# Altium PCB Master_PCB.PcbDoc
Units mm, origin at the board's own origin, x right, y up, seen from the top; angles counter-clockwise.
Board outline 90.25 x 90.25 mm, 4 copper layers (Top Layer, 3V3, M_GND, 5V), stack 0.603 mm thick; 75 components, 63 nets, 292 pads, 84 vias.
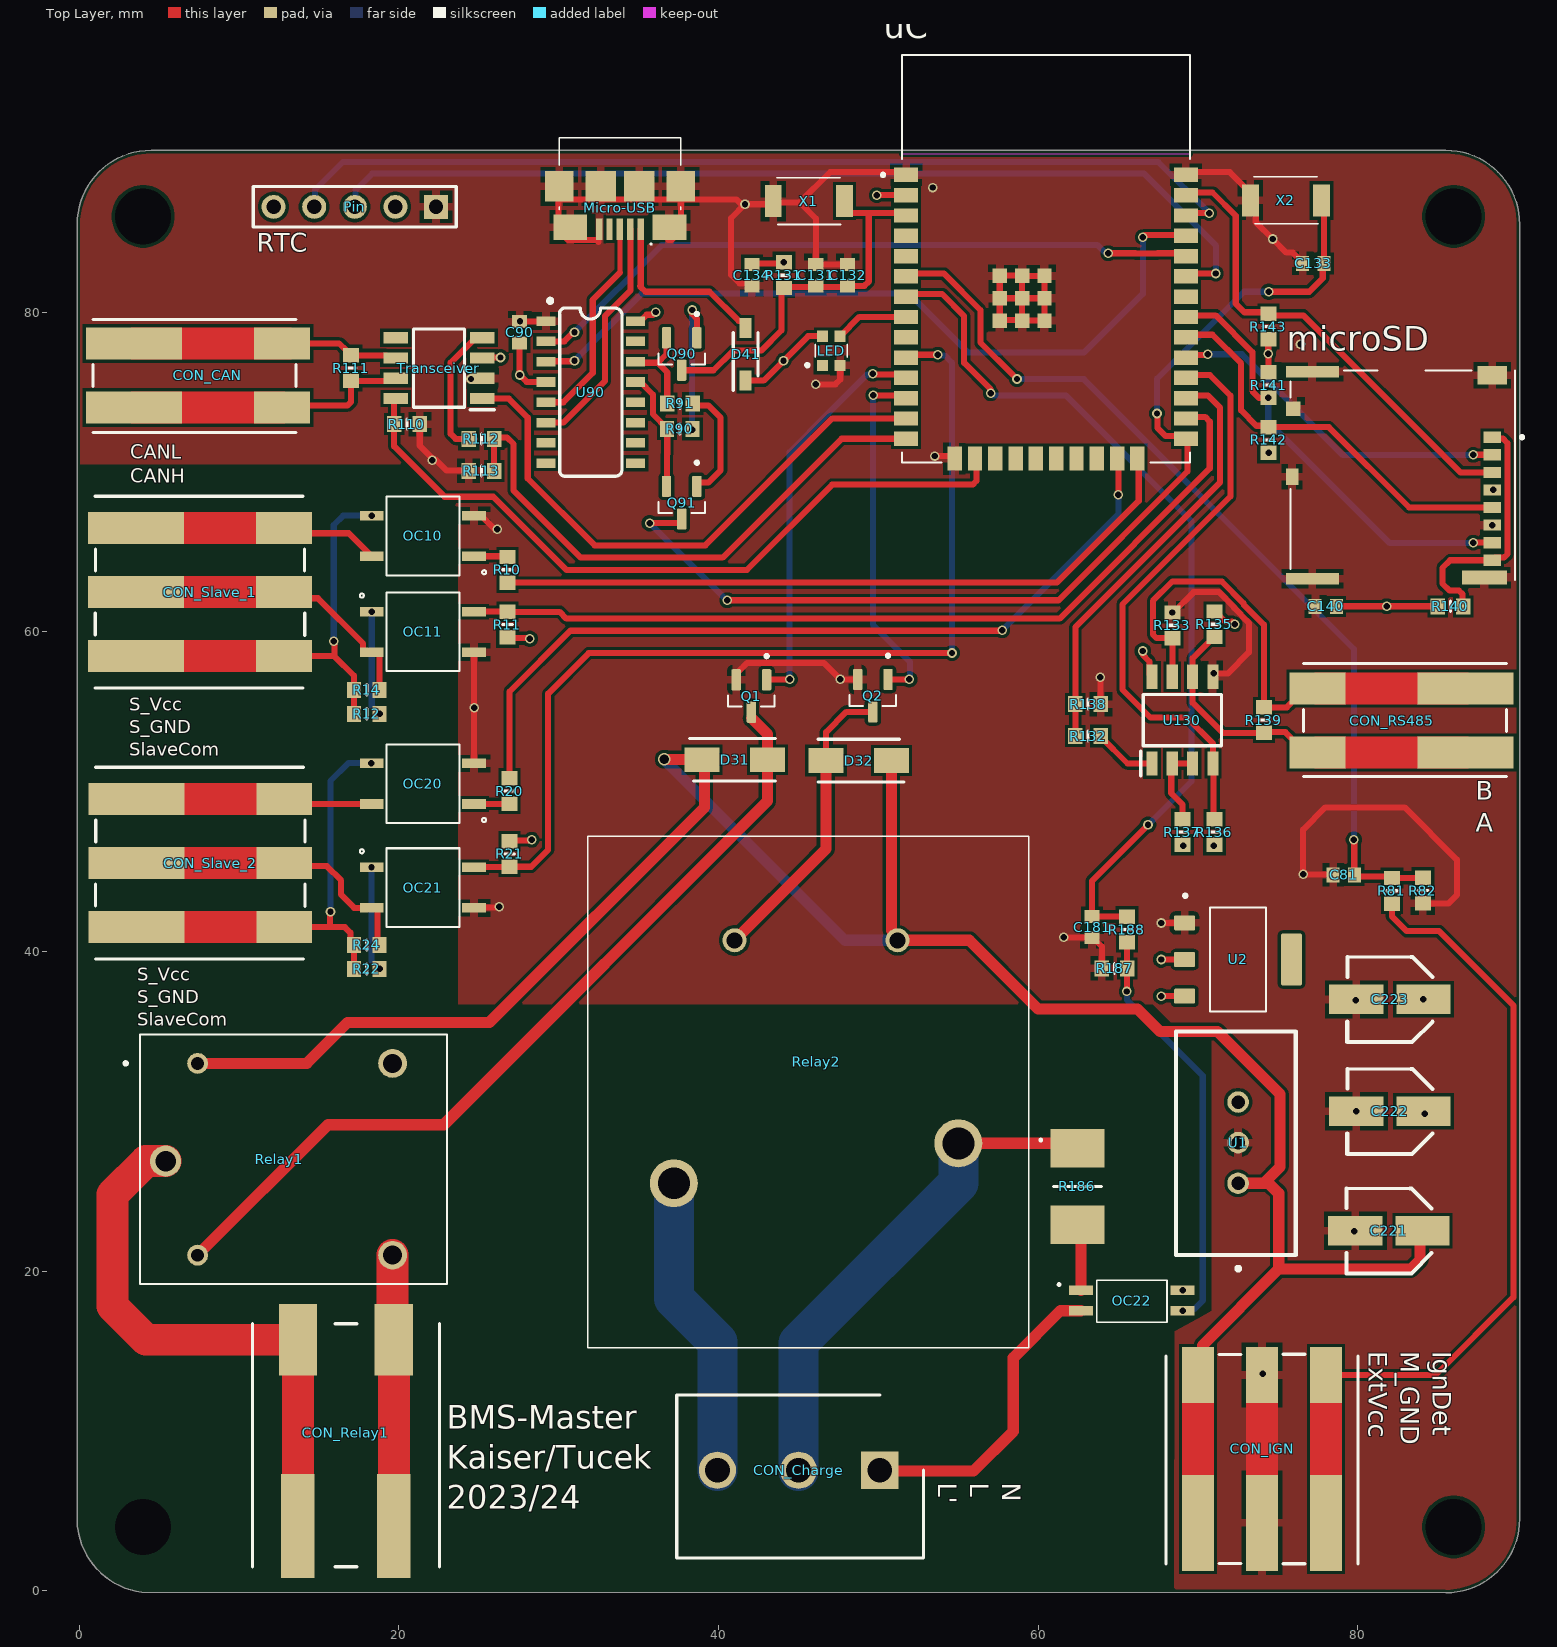
[diagram p0: Top Layer view]
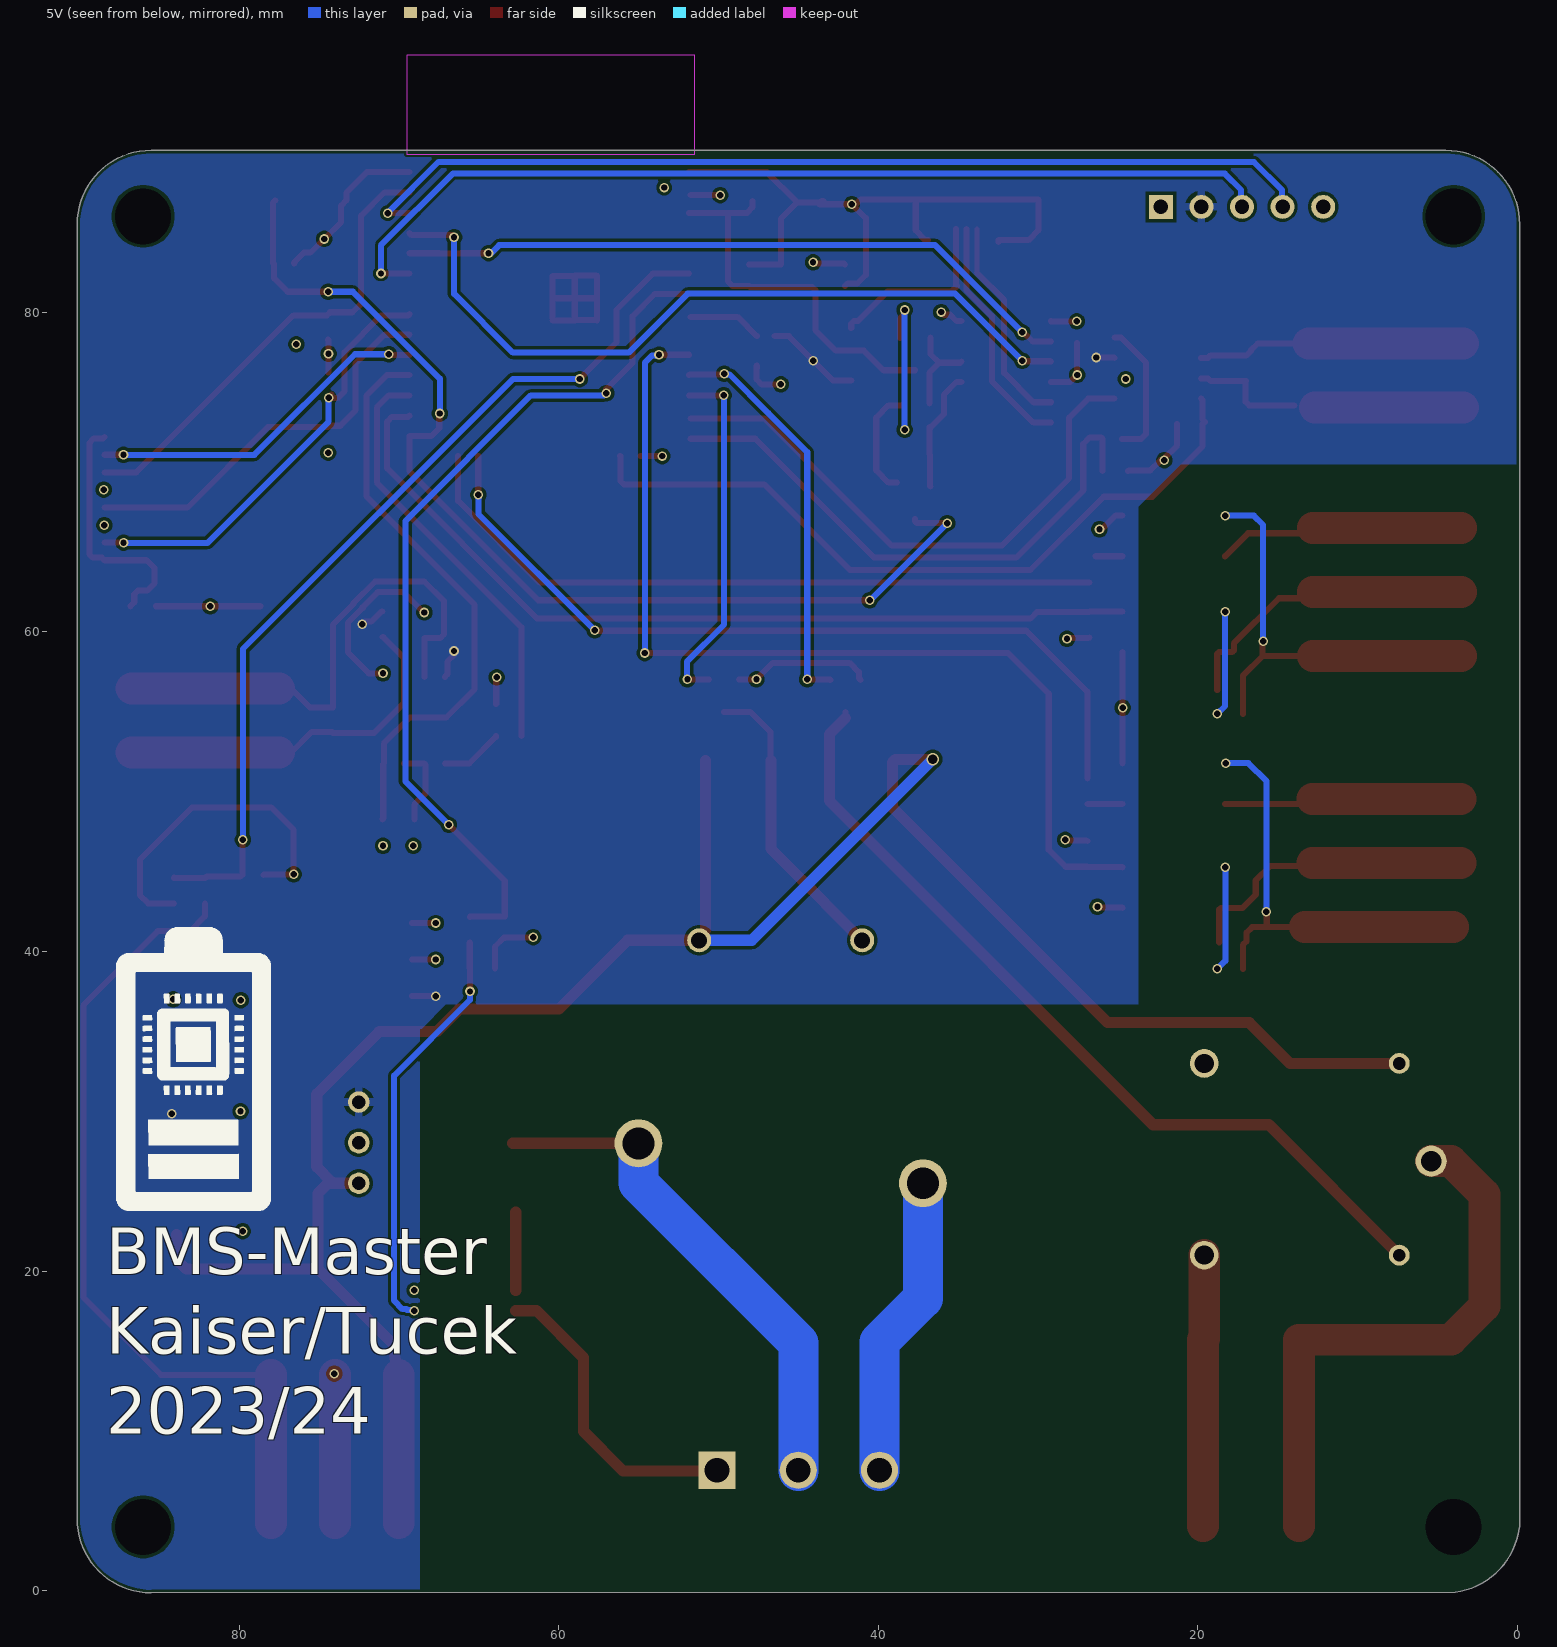
[diagram p1: 5V view, seen from below]
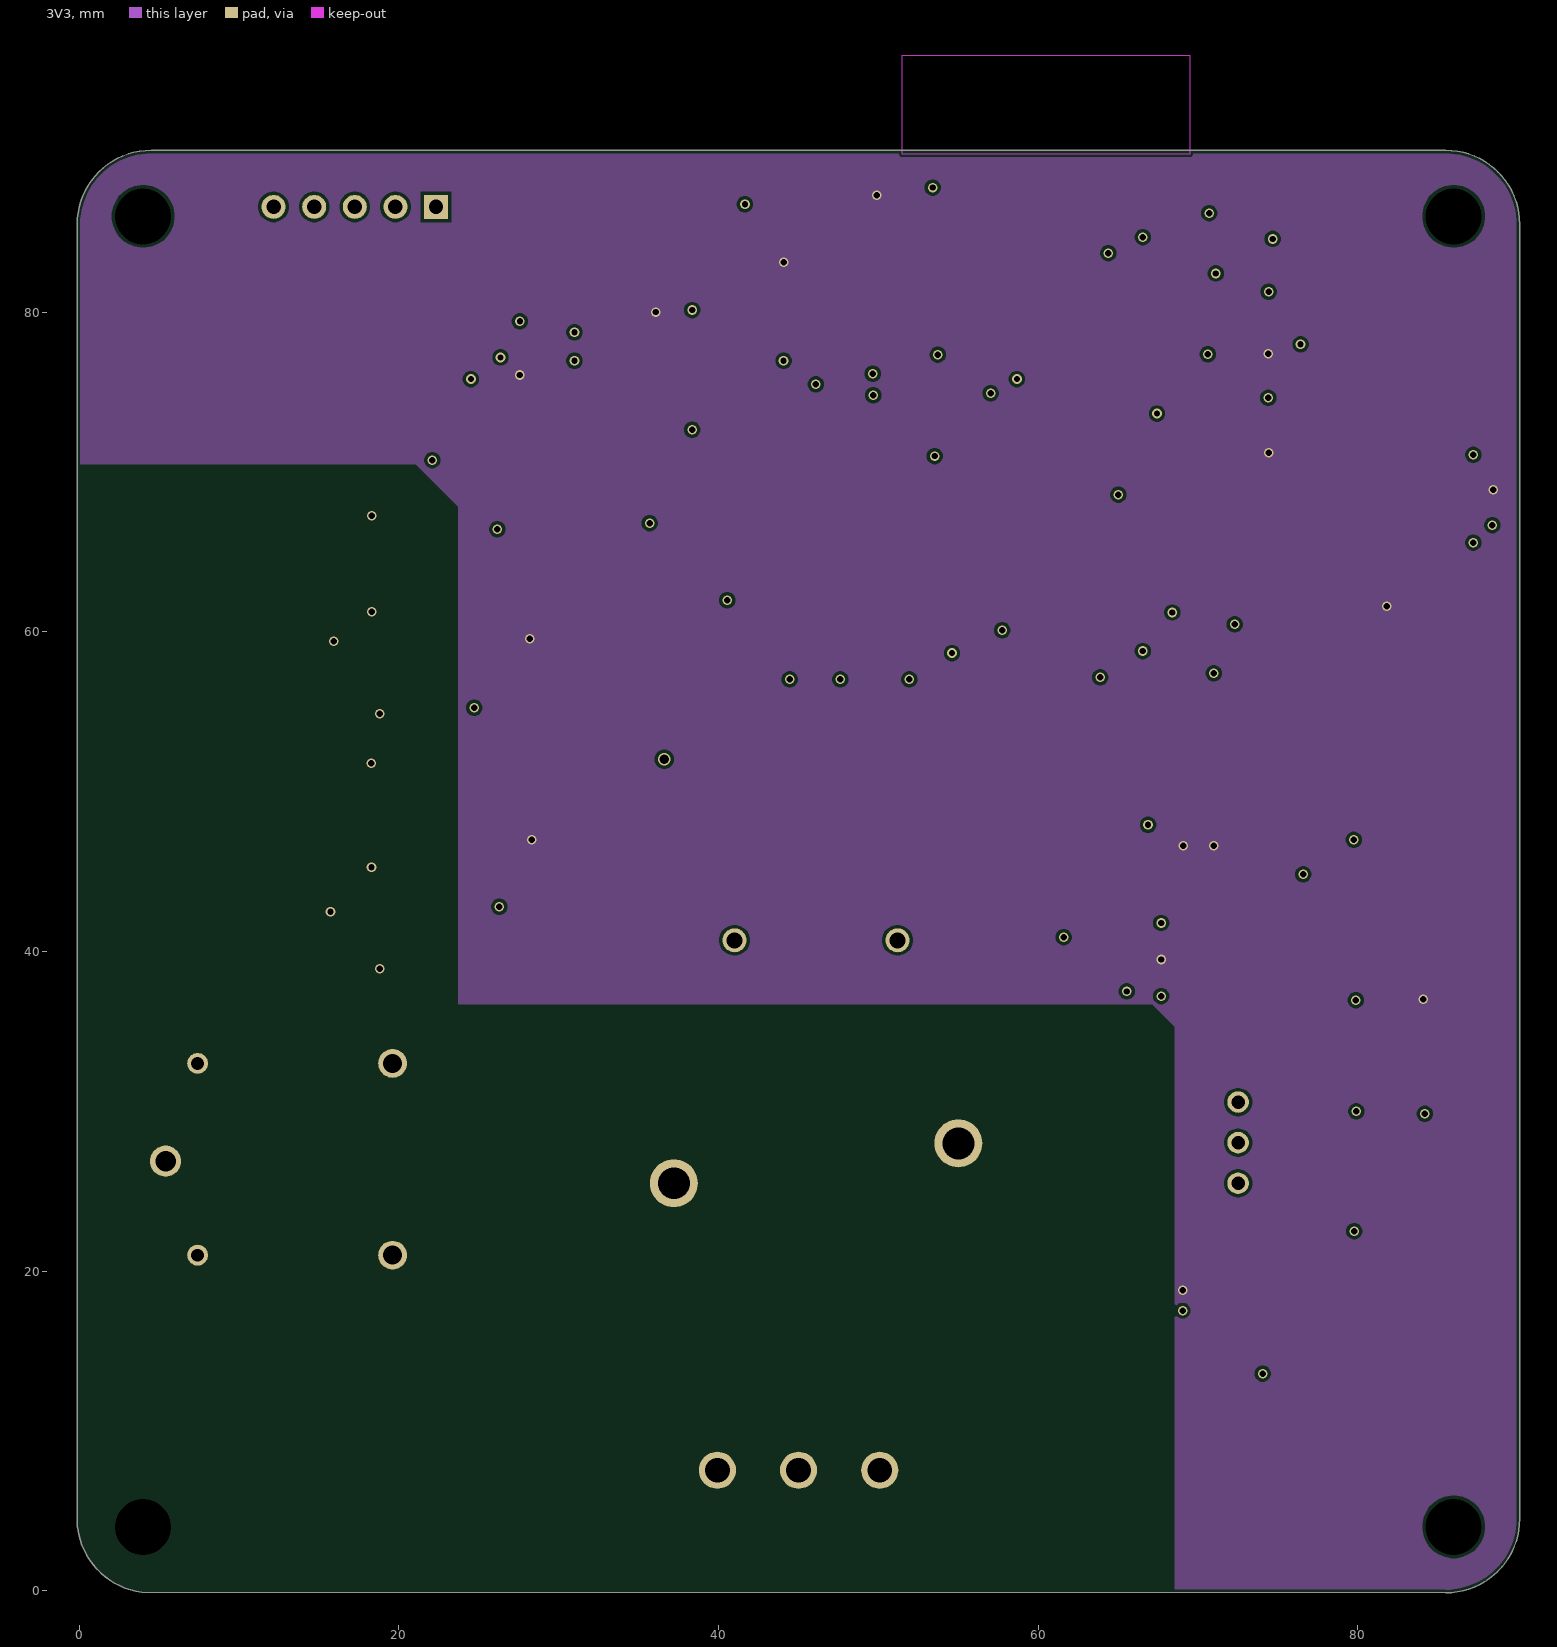
[diagram p2: 3V3]
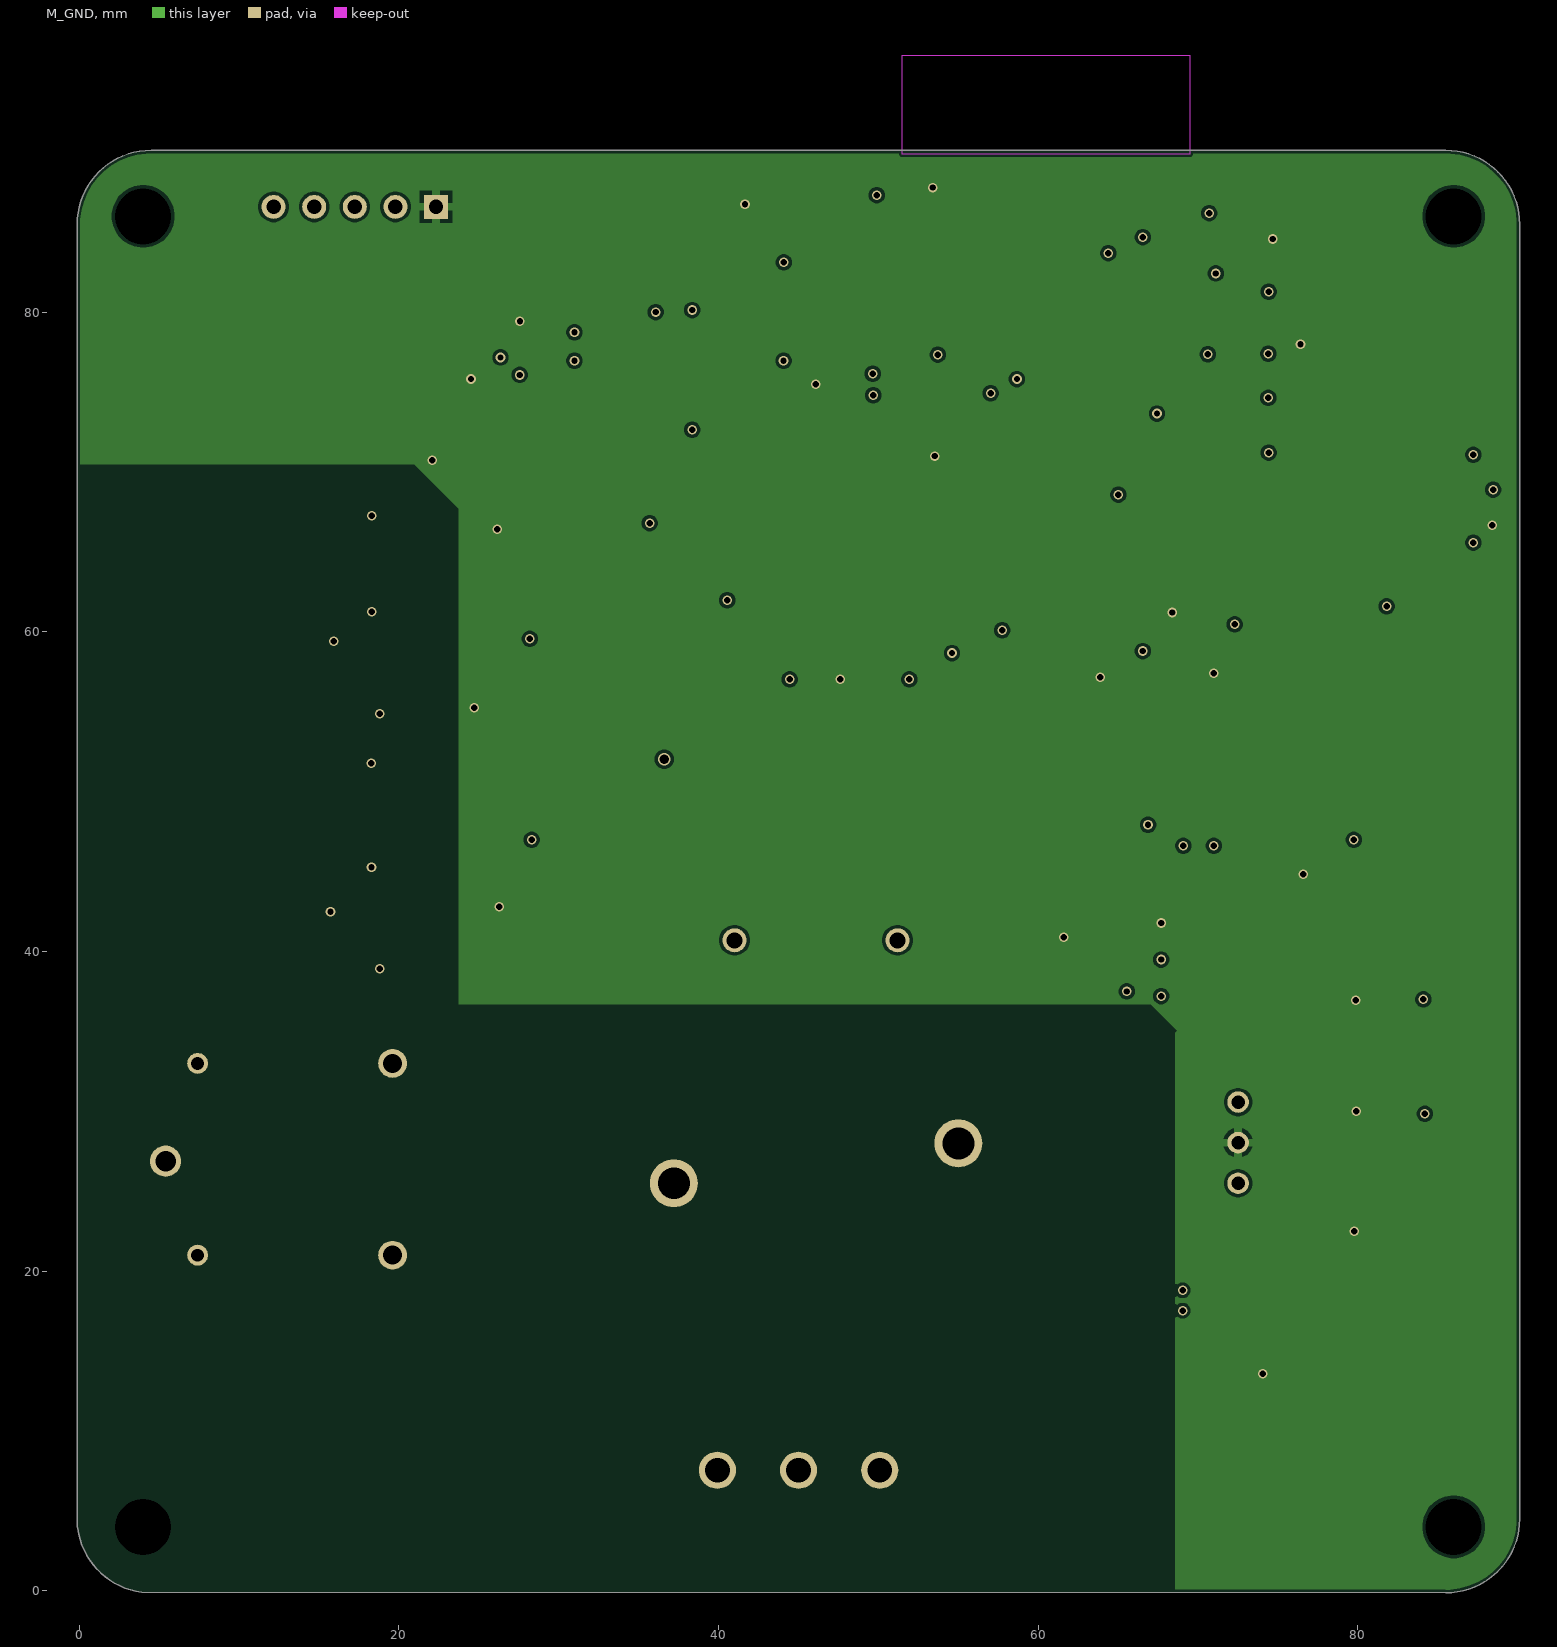
[diagram p3: M_GND]
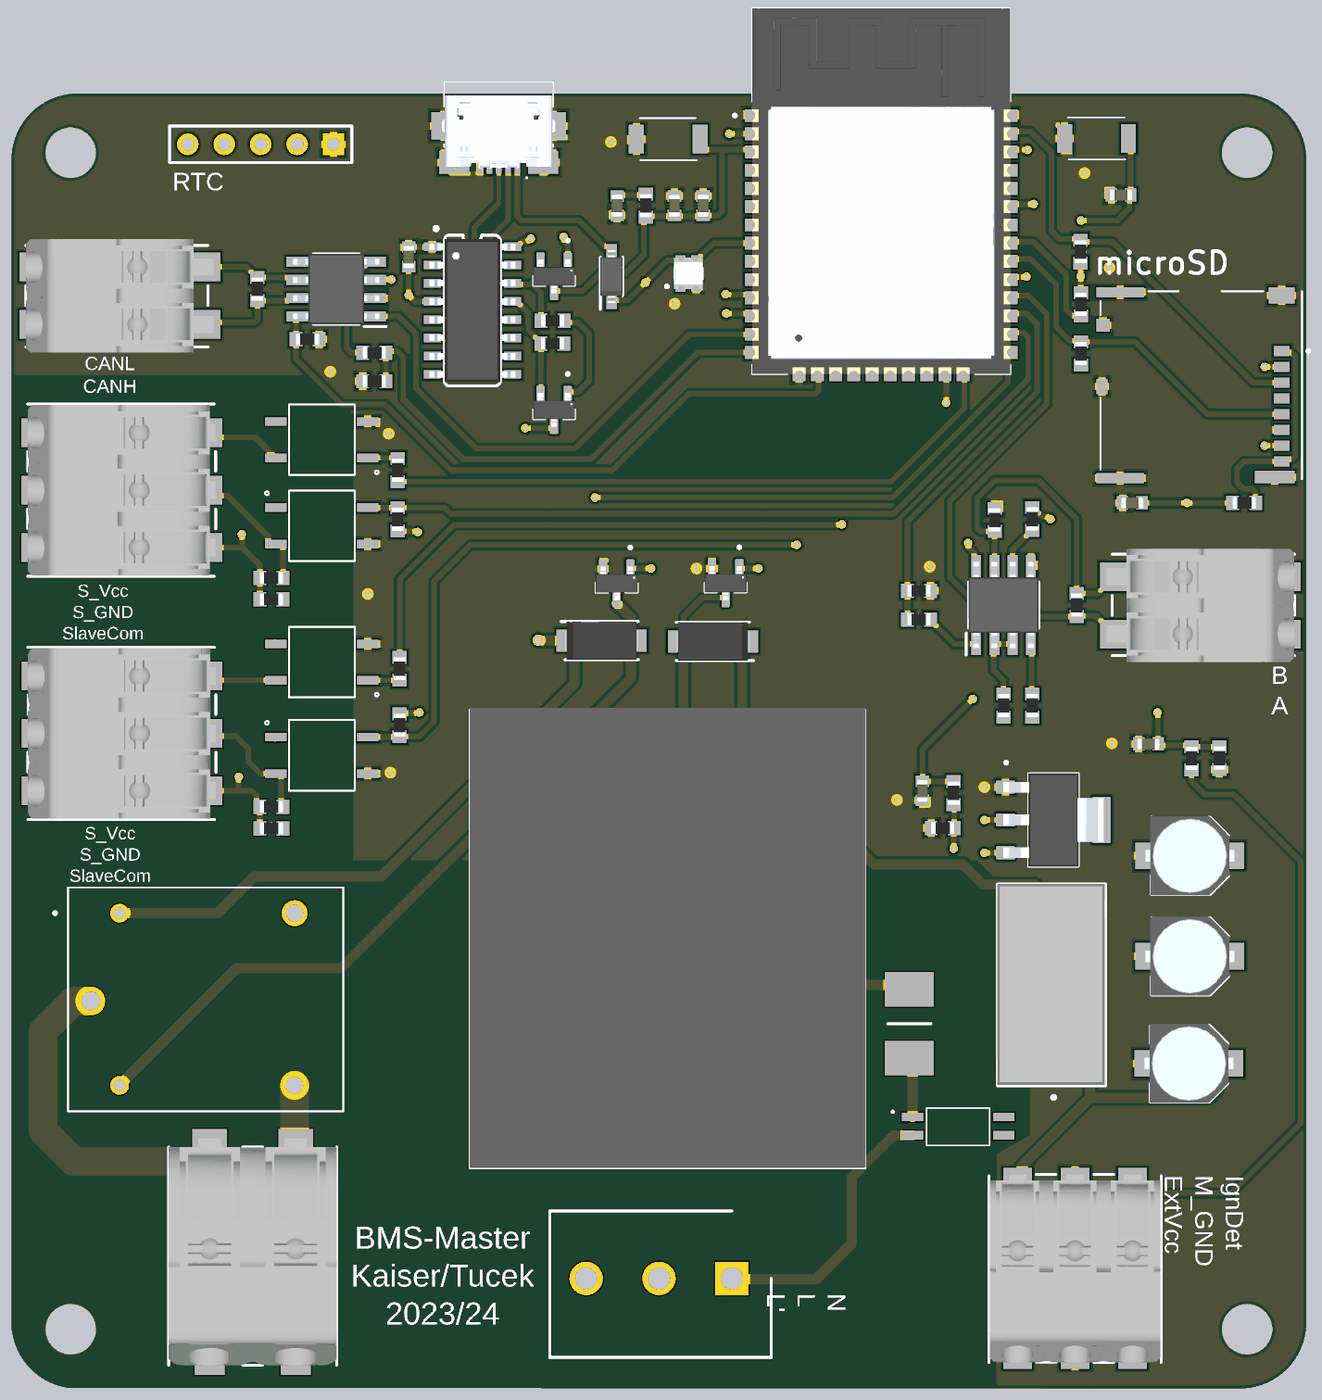
[diagram p4: 3D render of the assembled board from above, using the file's embedded part models]

## Layer stack, top to bottom
Top Solder: solder mask 0.0102, Solder Resist, Dk 3.5
Top Layer: signal copper 0.0356
Dielectric 2: prepreg 0.0711, PP-006, Dk 4.1
3V3: signal copper 0.035
Dielectric 1: dielectric 0.32, FR-4, Dk 4.8
M_GND: signal copper 0.035
Dielectric 3: prepreg 0.0711, PP-006, Dk 4.1
5V: signal copper 0.0356
Bottom Solder: solder mask 0.0102, Solder Resist, Dk 3.5

## Board outline
3.909,-0.09 cw(c4.5,4.5) -0.09,3.909 -0.127,4 -0.127,85.5 -0.127,85.501 cw(c4.5,85.5) 4.498,90.127 4.5,90.127 85.5,90.127 85.502,90.127 cw(c85.5,85.5) 90.127,85.502 90.127,85.5 90.127,4.5 90.127,4.498 cw(c85.5,4.5) 85.502,-0.127 85.5,-0.127

## Design rules (kind name [scope] priority, off if disabled: settings)
BoardOutlineClearance [All] p1: gap=0.2 ignorepadtopadclearanceinfootprint=FALSE except(0.4: Arc-SplitBarrior Arc-SplitContinuation Track-SplitBarrior Track-SplitContinuation SMDPad-SplitBarrior SMDPad-SplitContinuation THPad-SplitBarrior THPad-SplitContinuation Via-SplitBarrior Via-SplitContinuation Fill-SplitBarrior Fill-SplitContinuation Poly-SplitBarrior Poly-SplitContinuation Region-SplitBarrior Region-SplitContinuation Text-SplitBarrior Text-SplitContinuation)
Clearance "Clearance Bottom Layer" [OnLayer('Bottom Layer')] p1: gap=0.203 ignorepadtopadclearanceinfootprint=TRUE except(0.254: Arc-Text Track-Text SMDPad-Text THPad-Text Via-Text Fill-Text Poly-Text Region-Text Text-Text)
Clearance "Clearance Top Layer" [OnLayer('Top Layer')] p2: gap=0.203 ignorepadtopadclearanceinfootprint=TRUE except(0.254: Arc-Text Track-Text SMDPad-Text THPad-Text Via-Text Fill-Text Poly-Text Region-Text Text-Text)
Clearance [All] p3: gap=0.2 ignorepadtopadclearanceinfootprint=FALSE except(0.089: Arc-Arc Arc-Track Arc-SMDPad Track-Track Track-SMDPad SMDPad-SMDPad; 0.127: Arc-Via Track-Via SMDPad-Via THPad-Via Via-Via; 0.254: Arc-Text Track-Text SMDPad-Text THPad-Text Via-Text Fill-Text Poly-Text Region-Text Text-Text)
HoleSize [All] p1: absolutevalues=TRUE maxlimit=6.3 minlimit=0.2 maxpercent=80.000 minpercent=20.000
MinimumAnnularRing [All] p1: minimumring=0.076
MinimumSolderMaskSliver [All] p1: minsoldermaskwidth=0.1
PolygonConnect PolygonConnect_1 [All] p1: thpad.connectstyle=Relief thpad.reliefconductorwidth=0.508 thpad.reliefentries=4 thpad.polygonreliefangle="90 Angle" thpad.airgapwidth=0.254 smdpad.connectstyle=Relief smdpad.reliefconductorwidth=0.508 smdpad.reliefentries=4 smdpad.polygonreliefangle="90 Angle" smdpad.airgapwidth=0.254 via.connectstyle=Direct via.reliefconductorwidth=0.508 via.reliefentries=4 via.polygonreliefangle="90 Angle" via.airgapwidth=0.254
RoutingCorners [All] p1: cornerstyle=Round minsetback=2.54 maxsetback=2.54
RoutingVias [All] p1: holewidth=0.5 width=1 viastyle="Through Hole" minholewidth=0.15 minwidth=0.25 maxholewidth=1 maxwidth=2
SilkToSilkClearance [All] p1: silktosilkclearance=0.1
SilkToSolderMaskClearance [IsPad] p1: minsilkscreentomaskgap=0.1 clearancetoexposedcopper=TRUE
SolderMaskExpansion [All] p1: expansion=0.102 istentingtop=FALSE
Width [All] p1: maxlimit=2.54 minlimit=0.089 preferedwidth=0.381
25 further rules are at their usual default settings.

## Components (designator, comment, footprint, x,y, rotation, side; value= is the part's Value field where it differs from the comment)
C81 "1u" CAPC1608X90N 79.127,44.797 r0 top
C90 "100n" CAPC1608X90N 27.559,78.74 r90 top
C131 "100n" CAPC1608X90N 46.085,82.315 r270 top
C132 "100n" CAPC1608X90N 48.085,82.315 r270 top
C133 "100n" CAPC1608X90N 77.216,83.058 r0 top
C134 "100n" CAPC1608X90N 42.085,82.315 r90 top
C140 "0.1u" CAPC1608X90N 78,61.6 r0 top
C181 "1u" CAPC1608X90N 63.373,41.529 r270 top
C221 "100u" CAPAE530X550N 81.95,22.525 r180 top
C222 "100u" CAPAE530X550N 82.008,30 r180 top
C223 "100u" CAPAE530X550N 82.008,37 r180 top
CON_CAN "2060-452_998-404" 2060-452998-404 0.871,76.041 r0 top
CON_Charge "WJ500V-5.08-3P" SHDR3W95P0X508_1X3_1524X1000X1420P 50.089,7.544 r180 top
CON_IGN "2060-453_998-404" 2060-453998-404 74.008,1.692 r90 top
CON_Relay1 "2061-602_998-404" 2061-602998-404 16.685,1.506 r90 top
CON_RS485 "2060-452_998-404" 2060-452998-404 89.299,54.451 r180 top
CON_Slave_1 "2060-453_998-404" 2060-453998-404 0.998,62.484 r0 top
CON_Slave_2 "2060-453_998-404" 2060-453998-404 1.019,45.529 r0 top
D31 "ES1D-E3_61T" DIOM5127X229N 41.008,52 r0 top
D32 "ES1D-E3_61T" DIOM5127X229N 48.768,51.943 r180 top
D41 "BAT43W-E3-08" SOD3716X135N 41.696,77.37 r90 top
LED "WS2812C-2020" WS2812C2020 47.058,77.585 r270 top
Micro-USB "10118192-0002LF" 101181920002LF 33.833,88.062 r180 top
microSD "503398-1892" MOLEX_503398-1892 82.8,69.8 r270 top
OC10 "VOM617AT" SOIC254P695X242-4N 21.508,66 r180 top
OC11 "VOM617AT" SOIC254P695X242-4N 21.508,60 r0 top
OC20 "VOM617AT" SOIC254P695X242-4N 21.508,50.5 r180 top
OC21 "VOM617AT" SOIC254P695X242-4N 21.508,44 r0 top
OC22 "EL3H4-G" EL3H4G 65.862,18.161 r0 top
Pin "Header 5" HDR1X5 22.323,86.593 r180 top
Q1 "AO3400A" SOT95P237X112-3N 42.058,55.985 r270 top
Q2 "AO3400A" SOT95P237X112-3N 49.657,56.007 r270 top
Q90 "BC817-25_RF" SOT95P237X112-3N 37.696,77.386 r270 top
Q91 "BC817-25_RF" SOT95P237X112-3N 37.696,68.084 r270 top
R10 "120" RESC1608X55N 26.797,63.881 r270 top
R11 "680" RESC1608X55N 26.797,60.452 r270 top
R12 "220" RESC1608X55N 17.992,54.873 r180 top
R14 "2k7" RESC1608X55N 17.992,56.373 r180 top
R20 "120" RESC1608X55N 26.924,50.038 r90 top
R21 "680" RESC1608X55N 26.924,46.101 r90 top
R22 "220" RESC1608X55N 17.992,38.912 r180 top
R24 "2k7" RESC1608X55N 17.992,40.412 r180 top
R81 "33k" RESC1608X55N 82.127,43.797 r270 top
R82 "10k" RESC1608X55N 84.074,43.815 r90 top
R90 "10k" RESC1608X55N 37.575,72.7 r0 top
R91 "10K" RESC1608X55N 37.592,74.295 r0 top
R110 "N.P." RESC1608X55N 20.508,73 r0 top
R111 "120" RESC1608X55N 17.008,76.5 r90 top
R112 "18k" RESC1608X55N 25.165,72.074 r0 top
R113 "33k" RESC1608X55N 25.165,70.074 r0 top
R131 "10k" RESC1608X55N 44.085,82.315 r270 top
R132 "18k" RESC1608X55N 63.129,53.476 r0 top
R133 "22k" RESC1608X55N 68.4,60.411 r90 top
R135 "22k" RESC1608X55N 71.027,60.476 r270 top
R136 "10k" RESC1608X55N 71.027,47.476 r90 top
R137 "10k" RESC1608X55N 69.027,47.476 r90 top
R138 "33k" RESC1608X55N 63.129,55.476 r180 top
R139 "120" RESC1608X55N 74.129,54.476 r270 top
R140 "10k" RESC1608X55N 85.8,61.6 r0 top
R141 "10k" RESC1608X55N 74.422,75.438 r270 top
R142 "10k" RESC1608X55N 74.422,72.009 r90 top
R143 "10k" RESC1608X55N 74.4,79.1 r90 top
R186 "120k" 2512RES 62.459,25.298 r270 top
R187 "10k" RESC1608X55N 64.786,38.942 r180 top
R188 "33k" RESC1608X55N 65.548,41.374 r90 top
Relay1 "SRD-12VDC-SL-C" RELAY_SRD-12VDC-SL-C 13.508,27 r0 top
Relay2 "SLA-12VDC-SL-A" SLA12VDCSLA 36.72,26.476 r0 top
Transceiver "TJA1050T_CM_118" SOIC127P600X175-8N 22.508,76.5 r180 top
U1 "TSR_2-2450" TSR-2 68.618,21 r90 top
U2 "AMS1117-3.3" SOT229P700X180-4N 72.508,39.5 r270 top
U90 "CH340C" SO016 32.008,75 r270 top
U130 "MAX485ESA+T" SOIC127P600X175-8N 69.027,54.476 r90 top
uC "ESP32-WROOM-32E_(16MB)" "XCVR_ESP32-WROOM-32E_(16MB) - duplicate" 60.495,83.332 r0 top
X1 "TS-1088R-02026" TS1088R02026 45.65,86.95 r180 top
X2 "TS-1088R-02026" TS1088R02026 75.508,87 r180 top

## Footprints (in the part's own frame and the unit in brackets; to place one, negate y for a bottom-side part, rotate by r counter-clockwise, add the part's x,y. Pads: shape width x height; smd on the part's side, far side on the other; paste and mask are expansions set on the pad)
2060-452998-404 [mm]
  rect 3.5x2 smd: 1(11.808,-2) 3(11.808,2)
  rect 6x2 smd: 2(2.558,-2) 4(2.558,2)
  silkscreen extent 0,-3.57 12.7,3.5, body extent 0,-3.95 13.1,3.95, height 5.5
2060-453998-404 [mm]
  rect 3.5x2 smd: 1(11.808,-4) 3(11.808,0) 5(11.808,4)
  rect 6x2 smd: 2(2.558,-4) 4(2.558,0) 6(2.558,4)
  silkscreen extent 0,-6 13.11,6, body extent 0,-5.95 13.1,5.95, height 5.5
2061-602998-404 [mm]
  rect 4.5x2.4 smd: 1(14.2,-3) 3(14.2,3)
  rect 6.5x2.1 smd: 2(2.558,-3) 4(2.558,3)
  silkscreen extent 0,-5.85 15.2,5.85, body extent 0,-5.85 15.8,5.85, height 6.75
2512RES [mm]
  rect 2.4x3.4 smd: 1(-2.4,0) 2(2.4,0)
  silkscreen extent 0,-1.5 0,1.5
101181920002LF [mm]
  rect 0.4x1.35 smd: 1(-1.3,2.862) 2(-0.65,2.862) 3(0,2.862) 4(0.65,2.862) 5(1.3,2.862)
  rect 2.1x1.6 smd: MP1(-3.1,2.737) MP6(3.1,2.737)
  rect 1.8x1.9 smd: MP2(-3.8,0.188) MP5(3.8,0.188)
  rect 1.9x1.9 smd: MP3(-1.2,0.188) MP4(1.2,0.188)
  silkscreen extent -3.8,-2.86 3.8,3.85, body extent -3.95,-1.95 3.95,3.15, height 2.77
CAPAE530X550N [mm]
  rect 3.4x1.85 smd: 1(-2.1,0) 2(2.1,0)
  silkscreen extent -2.67,-2.65 2.67,2.67, body extent -3.1,-2.75 3.1,2.75, height 5.5
CAPC1608X90N [mm]
  rect 0.81x0.94 smd: 1(-0.67,0) 2(0.67,0)
  body extent -0.8,-0.4 0.8,0.4, height 0.9
DIOM5127X229N [mm]
  rect 2.2x1.55 smd: 1(-2.05,0) 2(2.05,0)
  silkscreen extent -2.83,-1.33 2.55,1.33, body extent -2.55,-1.33 2.55,1.33, height 2.29
EL3H4G [mm]
  rect 1.5x0.6 smd: 1(-3.175,0.635) 2(-3.175,-0.635) 3(3.175,-0.635) 4(3.175,0.635)
  silkscreen extent -4.6,-1.35 2.2,1.27
HDR1X5 [mm] "Connector; Header; 5 Position"
  rect 1.5x1.5 hole 0.9: 1(0,0)
  round 1.5 hole 0.9: 2(2.54,0) 3(5.08,0) 4(7.62,0) 5(10.16,0)
  silkscreen extent -1.27,-1.27 11.43,1.27
MOLEX_503398-1892 [mm]
  rect 0.7x1.1 smd: 1(-2.38,5.625) 2(-1.28,5.625) 3(-0.18,5.625) 4(0.92,5.625) 5(2.02,5.625) 6(3.12,5.625) 7(4.22,5.625) 8(5.32,5.625)
  rect 0.9x0.93 smd: 9(-4.17,-6.84)
  rect 1.05x0.78 smd: 10(0.095,-6.915)
  rect 1.14x1.83 smd: P1(-6.26,5.61)
  rect 0.86x2.8 smd: P2(6.4,5.125)
  rect 0.7x3.33 smd: P3(-6.48,-5.64) P4(6.48,-5.64)
  silkscreen extent -6.55,-7.02 6.55,7.57
RELAY_SRD-12VDC-SL-C [mm]
  round 1.308 hole 0.8: COIL1(-6.1,6) COIL2(-6.1,-6)
  round 1.95 hole 1.3: COM(-8.1,-0.12)
  round 1.8 hole 1.2: NC(6.1,6) NO(6.1,-6)
  silkscreen extent -10.7,-7.8 9.5,7.8
RESC1608X55N [mm]
  rect 0.9x1 smd: 1(-0.8,0) 2(0.8,0)
  silkscreen extent 0,-0.31 0,0.31, body extent -0.8,-0.41 0.8,0.41, height 0.55
SHDR3W95P0X508_1X3_1524X1000X1420P [mm]
  rect 2.325x2.325 / inner round 2.325 / far side rect 2.325x2.325 hole 1.55: 1(0,0)
  round 2.325 hole 1.55: 2(5.08,0) 3(10.16,0)
  silkscreen extent -2.74,-4.7 12.7,5.5
SLA12VDCSLA [mm]
  round 3 hole 2: 1(18.288,1.524) 4(0.488,-0.976)
  round 1.5 hole 1: 2(14.488,14.224) 3(4.288,14.224)
  silkscreen extent -4.91,-11.28 23.49,20.72, body extent -4.91,-11.18 22.69,20.82, height 20.5
SO016 [mm]
  rect 0.6x1.2 smd: 1(-4.445,-2.8) 2(-3.175,-2.8) 3(-1.905,-2.8) 4(-0.635,-2.8) 5(0.635,-2.8) 6(1.905,-2.8) 7(3.175,-2.8) 8(4.445,-2.8) 9(4.445,2.8) 10(3.175,2.8) 11(1.905,2.8) 12(0.635,2.8) 13(-0.635,2.8) 14(-1.905,2.8) 15(-3.175,2.8) 16(-4.445,2.8)
  silkscreen extent -5.84,-2.67 5.26,1.95, body extent -5,-3 5,3, height 1.8
SOD3716X135N [mm]
  rect 1.25x0.75 smd: 1(-1.65,0) 2(1.65,0)
  silkscreen extent -2.27,-0.78 1.35,0.77, body extent -1.85,-0.77 1.85,0.77, height 1.35
SOIC127P600X175-8N [mm]
  rect 1.525x0.7 smd: 1(-2.712,1.905) 2(-2.712,0.635) 3(-2.712,-0.635) 4(-2.712,-1.905) 5(2.712,-1.905) 6(2.712,-0.635) 7(2.712,0.635) 8(2.712,1.905)
  silkscreen extent -3.47,-2.45 1.6,2.6, body extent -3,-2.45 3,2.45, height 1.75
SOIC254P695X242-4N [mm]
  rect 1.5x0.6 smd: 1(-3.205,1.27) 2(-3.205,-1.27) 3(3.205,-1.27) 4(3.205,1.27)
  silkscreen extent -3.95,-2.46 2.28,2.46
SOT95P237X112-3N [mm]
  rrect25% 1.32x0.59 smd: 1(-1.015,0.95) 2(-1.015,-0.95) 3(1.015,0)
  silkscreen extent -2.6,-1.46 0.65,1.46, body extent -1.18,-1.46 1.18,1.46, height 1.12
SOT229P700X180-4N [mm]
  rrect15% 0.93x1.31 smd: 1(-2.29,-3.345) 2(0,-3.345) 3(2.29,-3.345)
  rrect15% 3.24x1.31 smd: 4(0,3.345)
  silkscreen extent -4.09,-3.4 3.25,1.75, body extent -3.25,-3.5 3.25,3.5, height 1.8
TS1088R02026 [mm]
  rect 1.05x2 smd: 1(-2.225,0) 2(2.225,0)
  silkscreen extent -2,-1.47 2,1.46
TSR-2 [mm]
  round 1.35 hole 0.85: 1(4.5,-3.89) 2(7.04,-3.89) 3(9.58,-3.89)
  silkscreen extent -0.96,-7.5 14,0, body extent 0.04,-7.47 14.04,0.03, height 9.92
WS2812C2020 [mm]
  rect 0.7x0.7 smd: 1(0.915,-0.55) 2(0.915,0.55) 3(-0.915,0.55) 4(-0.915,-0.55)
  silkscreen extent -0.4,-1.6 1,1, body extent -1.1,-1 1.1,1, height 0.85
"XCVR_ESP32-WROOM-32E_(16MB) - duplicate" [mm]
  rect 1.5x0.9 smd: 1(-8.75,5.26) 2(-8.75,3.99) 3(-8.75,2.72) 4(-8.75,1.45) 5(-8.75,0.18) 6(-8.75,-1.09) 7(-8.75,-2.36) 8(-8.75,-3.63) 9(-8.75,-4.9) 10(-8.75,-6.17) 11(-8.75,-7.44) 12(-8.75,-8.71) 13(-8.75,-9.98) 14(-8.75,-11.25) 25(8.75,-11.25) 26(8.75,-9.98) 27(8.75,-8.71) 28(8.75,-7.44) 29(8.75,-6.17) 30(8.75,-4.9) 31(8.75,-3.63) 32(8.75,-2.36) 33(8.75,-1.09) 34(8.75,0.18) 35(8.75,1.45) 36(8.75,2.72) 37(8.75,3.99) 38(8.75,5.26)
  rect 0.9x1.5 smd: 15(-5.715,-12.5) 16(-4.445,-12.5) 17(-3.175,-12.5) 18(-1.905,-12.5) 19(-0.635,-12.5) 20(0.635,-12.5) 21(1.905,-12.5) 22(3.175,-12.5) 23(4.445,-12.5) 24(5.715,-12.5)
  rect 0.9x0.9 smd: 39_1(-2.9,-1.06) 39_2(-1.5,-1.06) 39_3(-0.1,-1.06) 39_4(-2.9,-2.46) 39_5(-1.5,-2.46) 39_6(-0.1,-2.46) 39_7(-2.9,-3.86) 39_8(-1.5,-3.86) 39_9(-0.1,-3.86)
  Keep-Out Layer region: 9,6.56 -9,6.56 -9,12.75 9,12.75
  silkscreen extent -10.3,-12.75 9,12.75, body extent -9,-12.75 9,12.75, height 3.25

## Part data
C81 C90 C131 C132 C133 C134 C140: library part CAP
C181: library part CAP, "Tp mit fg 5Hz"
C221 C222 C223: library part ELKO
CON_CAN CON_RS485: "Connector", Arrow Part Number=2060-452/998-404, Manufacturer_Name=Wago, Manufacturer_Part_Number=2061-602/998-404, Arrow Price/Stock=https://www.arrow.com/en/products/2060-452998-404/wago-kontakttechnik-gmbh?region=nac
CON_Charge: "P=5.08mm Screw terminal RoHS", Manufacturer_Name="Ningbo Kangnex", Datasheet Link=https://datasheet.lcsc.com/szlcsc/Ningbo-Kangnex-Elec-WJ500V-5-08-3P-14-00A_C72334.pdf, Geometry.Height=14.2mm, Manufacturer_Part_Number=WJ500V-5.08-3P
CON_IGN CON_Relay1 CON_Slave_1 CON_Slave_2: "Connector", Arrow Part Number=2060-452/998-404, Manufacturer_Name=Wago, Arrow Price/Stock=https://www.arrow.com/en/products/2060-452998-404/wago-kontakttechnik-gmbh?region=nac, Manufacturer_Part_Number=2060-452/998-404
D31 D32: "Diode", Arrow Part Number=ES1D-E3/61T, Manufacturer_Name=Vishay, Mouser Part Number=625-ES1D-E3, Arrow Price/Stock=https://www.arrow.com/en/products/es1d-e361t/vishay, Datasheet Link=https://componentsearchengine.com/Datasheets/2/ES1D-E3_61T.pdf, Height=2.29mm, Manufacturer_Part_Number=ES1D-E3/61T, Mouser Price/Stock=https://www.mouser.co.uk/ProductDetail/Vishay-General-Semiconductor/ES1D-E3-61T?qs=rfh7uIuiIO0XwaKoN5aNdQ%3D%3D
D41: "Diode", Manufacturer_Name=Vishay, Mouser Part Number=78-BAT43W-E3-08, Arrow Part Number=BAT43W-E3-08, Arrow Price/Stock=https://www.arrow.com/en/products/bat43w-e3-08/vishay?region=nac, Datasheet Link=https://www.arrow.com/en/products/bat43w-e3-08/vishay, Height=1.35mm, Manufacturer_Part_Number=BAT43W-E3-08, Mouser Price/Stock=https://www.mouser.co.uk/ProductDetail/Vishay-Semiconductors/BAT43W-E3-08?qs=KP8Io%2FXyE5RCw3lmmA3XwQ%3D%3D
LED: "LED", Manufacturer_Name=Worldsemi, Datasheet Link=http://www.world-semi.com/DownLoadFile/139, Height=0.84mm, Manufacturer_Part_Number=WS2812C-2020
Micro-USB: "Connector", Manufacturer_Name=Amphenol, Mouser Part Number=649-10118192-0002LF, Arrow Part Number=10118192-0002LF, Arrow Price/Stock=https://www.arrow.com/en/products/10118192-0002lf/amphenol-fci?region=nac, Datasheet Link=https://componentsearchengine.com/Datasheets/1/10118192-0002LF.pdf, Height=3.05mm, Manufacturer_Part_Number=10118192-0002LF, Mouser Price/Stock=https://www.mouser.co.uk/ProductDetail/Amphenol-FCI/10118192-0002LF?qs=KVgMXE4aH4nIkuWlMxQzog%3D%3D
microSD: "9 (8 + 1) Position Card Connector Secure Digital - microSDâ„¢ Surface Mount, Right Angle Gold", Package=None, Availability="In Stock", Check_prices=https://www.snapeda.com/parts/5033981892/Molex/view-part/?ref=eda, MF=Molex, MP=5033981892, Price=None, Purchase-URL=https://pricing.snapeda.com/search/part/5033981892/?ref=eda, SnapEDA_Link=https://www.snapeda.com/parts/5033981892/Molex/view-part/?ref=snap
OC10 OC11 OC20 OC21: "Optoisolator Transistor Output 3750Vrms 1 Channel 4-SOP _2.54mm_", Package="SOP-4 Vishay Semiconductor", Availability=Unavailable, MF="Vishay Semiconductor", MP=VOM617AT, Price=None, SnapEDA_Link=https://www.snapeda.com/parts/VOM617AT/Vishay%20Semiconductor%20Opto%20Division/view-part/289684/?ref=snap
OC22: "OPTOISOLATOR 3.75KV TRANS 4-SSOP", Manufacturer_Name=Everlight, Mouser Part Number=638-EL3H4G, Datasheet Link=https://componentsearchengine.com/Datasheets/1/EL3H4-G.pdf, Geometry.Height=2mm, Manufacturer_Part_Number=EL3H4-G, Mouser Price/Stock=https://www.mouser.co.uk/ProductDetail/Everlight/EL3H4-G?qs=8PzhAHr7IdNyIMBpWTp8ig%3D%3D
Pin: "Header, 5-Pin", LatestRevisionDate=17-Jul-2002, LatestRevisionNote="Re-released for DXP Platform.", Publisher="Altium Limited"
Q1 Q2: "Trans MOSFET N-CH 30V 5.7A 3-Pin SOT-23", Package=None, Availability=Unavailable, MP=AO3400A, Price=None
Q90 Q91: "SOT-23, 50V, 0.5A, NPN Bipolar Transistor", Package="SOT-23 Taiwan Semiconductor", Availability="In Stock", Check_prices=https://www.snapeda.com/parts/BC817-25%20RF/Taiwan+Semiconductor/view-part/?ref=eda, MF="Taiwan Semiconductor", MP="BC817-25 RF", Price=None, Purchase-URL="https://pricing.snapeda.com/search/part/BC817-25 RF/?ref=eda", SnapEDA_Link=https://www.snapeda.com/parts/BC817-25%20RF/Taiwan+Semiconductor/view-part/?ref=snap
R10 R11 R12 R14 R20 R21 R22 R24 R81 R82 R90 R91 R110 R111 R112 R113 R131 R132 R133 R135 R136 R137 R138 R139 R140 R141 R142 R143 R186 R187: library part RES
R188: library part RES, "TP mit fg 5Hz"
Relay1: "General Purpose Non Latching 12VDC SPDT Through Hole Relays RoHS", Package=None, Availability=Unavailable, MP=SRD-12VDC-SL-C, Price=None
Relay2: "Relay or Contactor", Manufacturer_Name="Songle Relay", Datasheet Link=https://datasheet.lcsc.com/szlcsc/1811200235_Ningbo-Songle-Relay-SLA-12VDC-SL-A_C55194.pdf, Height=20.4mm, Manufacturer_Part_Number=SLA-12VDC-SL-A
Transceiver: "NXP - TJA1050T/CM,118 - CAN TRANSCEIVER, 1TX/RX, SOIC-8", Arrow Part Number=TJA1050T/CM,118, Manufacturer_Name=NXP, Mouser Part Number=771-TJA1050T/CM118, Arrow Price/Stock=https://www.arrow.com/en/products/tja1050tcm118/nxp-semiconductors?region=nac, Datasheet Link=http://www.nxp.com/docs/en/data-sheet/TJA1050.pdf, Geometry.Height=1.75mm, Manufacturer_Part_Number=TJA1050T/CM,118, Mouser Price/Stock=https://www.mouser.co.uk/ProductDetail/NXP-Semiconductors/TJA1050T-CM118?qs=5XOdhvmYM0NFFspw0VP5sA%3D%3D
U1: "Power Supply", Arrow Part Number="TSR 2-2450", Manufacturer_Name="Traco Power", Mouser Part Number=495-TSR2-2450, Arrow Price/Stock=https://www.arrow.com/en/products/tsr2-2450/traco-electronic-ag?region=europe, Datasheet Link=https://tracopower.com/tsr2-datasheet/, Manufacturer_Part_Number="TSR 2-2450", Mouser Price/Stock=https://www.mouser.co.uk/ProductDetail/TRACO-Power/TSR-2-2450?qs=NtE2QagKf6RzknAolzm%2FTQ%3D%3D
U2: "Sot223/Pkg 1-Amp 3.3-Volt Low Drop Out Voltage Regulatator", Package="SOT-223 Seeed Technology", Availability="Not in stock", Check_prices=https://www.snapeda.com/parts/AMS1117-3.3/Advanced+Monolithic+Systems/view-part/?ref=eda, MF="Advanced Monolithic Systems", MP=AMS1117-3.3, Price=None, SnapEDA_Link=https://www.snapeda.com/parts/AMS1117-3.3/Advanced+Monolithic+Systems/view-part/?ref=snap
U90: "Replacement for Brother P-Touch", Package=None, Availability="Not in stock", Check_prices=https://www.snapeda.com/parts/CH340C/Olimex/view-part/?ref=eda, MF=Olimex, MP=CH340C, Price=None, SnapEDA_Link=https://www.snapeda.com/parts/CH340C/Olimex/view-part/?ref=snap
U130: "1/1 Transceiver Half RS422, RS485 8-SOIC", Package="SOIC-8 Maxim", Availability="In Stock", Check_prices=https://www.snapeda.com/parts/MAX485ESA/Maxim+Integrated/view-part/?ref=eda, MF="Maxim Integrated", MP=MAX485ESA, Price=None, Purchase-URL=https://pricing.snapeda.com/search/part/MAX485ESA/?ref=eda, SnapEDA_Link=https://www.snapeda.com/parts/MAX485ESA/Maxim+Integrated/view-part/?ref=snap
uC: "Bluetooth, WiFi 802.11b/g/n, Bluetooth v4.2 +EDR, Class 1, 2 and 3 Transceiver Module 2.4GHz ~ 2.5GHz Integrated, Trace Surface Mount", Package=None, Availability="Not in stock", Check_prices=https://www.snapeda.com/parts/ESP32-WROOM-32E%20(16MB)/Espressif+Systems/view-part/?ref=eda, MF="Espressif Systems", MP="ESP32-WROOM-32E (16MB)", Price=None, SnapEDA_Link=https://www.snapeda.com/parts/ESP32-WROOM-32E%20(16MB)/Espressif+Systems/view-part/?ref=snap
X1 X2: "SMD,3x4x2.0mm Tactile Switches", Manufacturer_Name=XUNPU, Datasheet Link=https://datasheet.lcsc.com/szlcsc/1912111437_XUNPU-TS-1088R-02026_C455280.pdf, Geometry.Height=2.2mm, Manufacturer_Part_Number=TS-1088R-02026

## Free pads (board coordinates)
  round 1.524 hole 3.5: 2(4,4) 2(4,86) 2(86,4) 2(86,86)

## Via types
v1: diameter 0.6, hole 0.4, Top Layer to 5V, 83 vias
v2: diameter 0.8, hole 0.6, Top Layer to 5V, 1 vias

## Nets (pads, with @x,y where several pads share a name; then routed paths per layer and width w, separated by ;. In a path a pad name is that pad's centre, name@x,y a point inside that pad or via, vN(x,y) a via of type N, cw(c..) or ccw(c..) an arc to the next point about the centre after c; other vN are vias at no path point)
3V3: C90.1 C134.2 C140.2 C223.1 microSD.4 OC22.4 R11.2 R21.2 R131.1 R136.1 R137.1 R140.1 R141.1 R142.1 R143.1 U2.2 U90.4 U90.16 uC.2 | length 22.1
  Top Layer w0.381: R11.2 26.842,59.607 28.15,59.607 v1(28.194,59.563) ; R21.2 26.969,46.945 28.264,46.945 v1(28.308,46.99) ; C90.1 v1(27.559,76.073) 27.997,75.635 U90.4 ; U90.16 35.108,79.445 35.503,79.84 35.898,79.84 v1(36.068,80.01) ; C134.2 42.15,83.05 44.02,83.05 v1(44.085,83.115) ; v1(49.9,87.325) 49.901,87.324 51.744,87.324 uC.2 ; v1(67.691,39.497) 67.693,39.499 69.161,39.499 U2.2 ; R141.1 74.411,76.249 74.411,77.389 v1(74.4,77.4) 74.4,78.256 R143.1@74.422,78.278 ; C140.2 R140.1@85.2,61.6
  other v1: 69.037,18.796 84.108,37 69.088,46.609 70.993,46.609 81.8,61.6 88.465,68.9 74.422,71.209
5V: C222.1 D41.1 LED.4 Pin.2 R135.1 Transceiver.3 U1.3 U2.3 U130.8 | length 12
  Top Layer w0.381: Transceiver.3 25.252,77.167 v1(26.359,77.167) ; D41.1 42.827,75.72 v1(44.069,76.962) 45.607,78.5 LED.4 ; v1(66.548,58.801) 66.548,58.56 66.963,58.146 66.963,57.347 U130.8 ; v1(67.691,37.211) U2.3@69.163,37.211 ; R135.1 71.077,61.276 71.717,60.636 72.123,60.636 v1(72.293,60.465)
  other v1: 84.201,29.845
M_GND: C81.1 C90.2 C131.1 C132.1 C133.1 C134.1 C140.1 C181.2 C221.2 C222.2 C223.2 CON_IGN.3 CON_IGN.4 LED.2 Micro-USB.5 Micro-USB.MP1 Micro-USB.MP2 Micro-USB.MP3 Micro-USB.MP4 Micro-USB.MP5 Micro-USB.MP6 microSD.6 microSD.9 microSD.10 microSD.P1 microSD.P2 microSD.P3 microSD.P4 OC10.2 OC11.3 OC20.2 OC21.3 Pin.1 Q1.2 Q2.2 R82.1 R110.2 R113.1 R133.2 R138.1 R187.2 Transceiver.2 U1.2 U2.1 U90.1 U130.5 uC.1 uC.15 uC.38 uC.39_1 uC.39_2 uC.39_3 uC.39_4 uC.39_5 uC.39_6 uC.39_7 uC.39_8 uC.39_9 X1.2 X2.2 | length 147.9
  Top Layer w0.381: R110.2 21.308,71.655 22.098,70.865 v1(22.098,70.739) 22.339,70.739 22.974,70.104 24.335,70.104 R113.1 ; OC21.3 24.748,42.764 26.254,42.764 v1(26.289,42.799) ; OC20.2 v1(24.713,55.25) OC11.3 ; OC10.2 25.163,67.27 26.012,66.421 v1(26.162,66.421) ; C90.2 v1(27.577,79.427) 29.191,79.427 U90.1 ; 32.482,84.387 32.482,84.502 32.473,84.512 30.591,84.512 29.982,85.121 29.982,87.061 Micro-USB.MP2@37.582,87.061 ; 36.882,84.512 37.051,84.512 37.66,85.121 37.66,86.983 Micro-USB.MP2@37.582,87.061 ; Q1.2 41.212,57.105 41.212,57.47 41.797,58.054 46.594,58.054 v1(47.625,57.023) Q2.2 Q2.2 ; v1@41.669,86.754 X1.2@43.674,86.754 ; C134.1 41.934,81.796 41.314,81.796 40.783,82.327 40.783,85.881 v1(41.656,86.754) 41.415,86.754 41.108,87.061 Micro-USB.MP2@37.582,87.061 ; X1.2@43.425,86.95 cw(c43.455,86.57) 43.691,86.869 43.692,86.868 45.085,86.868 ; v1(46.095,75.484) 47.313,75.484 47.617,75.788 47.617,76.511 47.608,76.519 LED.2 ; C132.1 46.117,82.985 46.101,83.001 46.101,85.852 45.085,86.868 ; uC.1@51.845,88.76 46.977,88.76 45.085,86.868 ; v1(53.525,71) uC.15@54.88,71 ; uC.39_4@57.695,80.872 uC.39_5 ; uC.39_2@58.961,82.306 57.629,82.306 uC.39_1 uC.39_4 57.595,79.64 uC.39_7 57.629,79.506 58.961,79.506 uC.39_8 uC.39_9 ; uC.39_8@58.995,79.64 uC.39_5 ; uC.39_5@59.095,80.872 uC.39_6 ; uC.39_9@60.395,79.64 uC.39_6 ; v1(61.595,40.894) 61.612,40.877 63.356,40.877 C181.2 63.438,40.859 63.986,40.311 R187.2 ; v1(63.881,57.15) 63.905,57.126 63.905,55.5 R138.1 ; v1(67.691,41.783) 67.694,41.786 69.16,41.786 U2.1 ; v1(68.4,61.211) 68.45,61.211 69.723,62.484 71.326,62.484 72.258,61.551 72.258,61.496 73.191,60.563 73.191,58.713 71.882,57.404 v1(70.993,57.404) ; uC.38@69.345,88.76 71.998,88.76 73.283,87.475 X2.2 73.617,86.666 73.617,85.641 v1(74.676,84.582) 75.529,83.729 75.94,83.729 76.546,83.123 C133.1 ; C81.1 78.44,44.814 76.598,44.814 v1(76.581,44.831) 76.581,47.625 77.978,49.022 82.931,49.022 86.202,45.751 86.202,43.53 85.687,43.015 R82.1 ; uC.39_5 uC.39_2 uC.39_3 uC.39_6
  Top Layer w2: CON_IGN.4 CON_IGN.3
  other v1: 74.041,13.589 79.771,22.504 79.908,30 79.883,36.957 88.425,66.68 24.511,75.819 76.418,77.989 53.4,87.8
NetC81_2: C81.2 R81.1 R82.2 uC.6 | length 57
  Top Layer w0.381: uC.6@51.845,82.41 54.115,82.41 56.388,80.137 56.388,78.105 58.42,76.073 ; v1(79.756,46.99) 79.777,46.969 79.777,44.817 C81.2 79.897,44.697 82.027,44.697 R81.1 82.136,44.606 84.065,44.606 R82.2
  5V w0.381: v1(58.674,75.819) 62.865,75.819 79.756,58.928 v1(79.756,46.99)
NetC131_2: C131.2 C132.2 Q90.3 R131.2 uC.3 X1.1 | length 24.3
  Top Layer w0.381: Q90.3 39.687,76.371 40.913,77.597 42.672,77.597 43.942,78.867 43.942,81.372 R131.2 44.15,81.58 48.02,81.58 C132.2 49.133,81.645 49.403,81.915 49.403,86.192 49.375,86.22 ; X1.1 47.875,86.554 48.21,86.22 49.375,86.22 ; uC.3@51.845,86.22 49.375,86.22
NetC133_2: C133.2 Q91.3 uC.25 X2.1 | length 66.5
  Top Layer w0.381: v1(35.687,66.802) 37.592,66.802 37.696,66.907 Q91.3 ; v1(40.546,61.976) 61.278,61.976 69.345,70.043 69.345,72.25 69.045,72.25 67.97,72.25 67.471,72.75 67.471,73.626 v1(67.437,73.66) ; v1(74.422,81.28) 76.962,81.28 77.81,82.128 C133.2@77.81,83.058 ; X2.1 77.886,86.847 C133.2
  5V w0.381: v1(35.687,66.802) v1@40.513,61.976 ; v1(67.437,73.66) 67.437,75.837 72.88,81.28 v1(74.422,81.28)
NetC181_1: C181.1 R188.2 uC.7 | length 54.7
  Top Layer w0.381: uC.7@51.845,81.14 53.988,81.14 55.372,79.756 55.372,76.835 v1@57.023,75.184 ; R188.2 65.536,42.187 63.385,42.187 C181.1 63.373,44.423 v1(66.875,47.925)
  5V w0.381: v1(57.023,74.93) 57.163,74.79 61.735,74.79 69.596,66.929 69.596,50.646 v1(66.875,47.925)
NetC221_1: C221.1 CON_IGN.5 CON_IGN.6 D31.1 D32.1 Relay1.COIL1 Relay2.2 U1.1 | length 144.3
  Top Layer w0.381: D31.1 D31.1@39.116,51.842
  Top Layer w0.7: Relay1.COIL1 14.233,33 16.793,35.56 25.654,35.56 39.116,49.022 D31.1@39.116,51.842 ; v2(36.6,52.025) 36.612,52.013 38.945,52.013 D31.1 ; D32.1 50.818,41.306 51.208,40.916 Relay2.2 55.693,40.7 59.993,36.4 66.216,36.4 67.615,35.001 71.222,35.001 75.133,31.09 75.133,26.518 74.233,25.617 ; CON_IGN.5 70.29,14.9 70.275,15.015 70.275,15.351 75.05,20.126 ; U1.1 74.424,25.5 75.05,24.874 75.05,20.126 ; C221.1@83.9,22.292 83.9,20.7 83.326,20.126 75.05,20.126
  Top Layer w2: CON_IGN.6 CON_IGN.5
  5V w0.7: v2(36.6,52.025) 47.925,40.7 Relay2.2
NetCON_CAN_1: CON_CAN.1 CON_CAN.2 R111.1 Transceiver.7 | length 16.6
  Top Layer w0.381: CON_CAN.1@13.97,74.168 16.795,74.168 17.018,74.391 17.018,75.69 R111.1 19.218,75.7 19.383,75.865 Transceiver.7
  Top Layer w2: CON_CAN.2 CON_CAN.1
NetCON_CAN_3: CON_CAN.3 CON_CAN.4 R111.2 Transceiver.6 | length 17.2
  Top Layer w0.381: CON_CAN.3 16.267,78.041 16.698,77.61 16.698,77.56 16.958,77.3 19.218,77.3 19.383,77.135 Transceiver.6
  Top Layer w2: CON_CAN.4 11.493,78.041 CON_CAN.3@13.088,78.041
NetCON_Charge_1: CON_Charge.1 OC22.2 | length 19.7
  Top Layer w0.381: 52.712,7.5 52.871,7.341
  Top Layer w0.7: CON_Charge.1@50.088,7.5 52.712,7.5 55.963,7.5 58.445,9.982 58.445,14.58 61.392,17.526 OC22.2
NetCON_Charge_2: CON_Charge.2 R186.1 Relay2.1 | length 32.5
  Top Layer w0.7: Relay2.1 R186.1@62.875,28
  5V w2.5: CON_Charge.2@45.008,7.5 45.008,15.508 55.008,25.508 Relay2.1
NetCON_Charge_3: CON_Charge.3 Relay2.4 | length 19.1
  5V w2.5: Relay2.4 37.208,18.292 39.928,15.572 CON_Charge.3@39.928,7.5
NetCON_IGN_1: CON_IGN.1 CON_IGN.2 R81.2 | length 52
  Top Layer w0.381: CON_IGN.1 84.874,13.5 89.737,18.363 89.737,36.628 85.09,41.275 83.058,41.275 82.134,42.199 82.134,42.99 R81.2
  Top Layer w2: CON_IGN.2 CON_IGN.1
NetCON_Relay1_1: CON_Relay1.1 CON_Relay1.2 Relay1.NO | length 16.9
  Top Layer w2: CON_Relay1.1@19.608,15.783 Relay1.NO ; CON_Relay1.2 CON_Relay1.1
NetCON_Relay1_3: CON_Relay1.3 CON_Relay1.4 Relay1.COM | length 35.3
  Top Layer w2: Relay1.COM 4.172,26.88 2.083,24.791 2.083,17.805 4.182,15.706 CON_Relay1.3 CON_Relay1.4
NetCON_RS485_1: CON_RS485.1 CON_RS485.2 R133.1 R139.1 U130.7 | length 32.7
  Top Layer w0.381: U130.7 68.396,57.192 68.396,59.607 R133.1 67.406,59.611 67.183,59.834 67.183,61.933 68.4,63.15 71.486,63.15 72.842,61.793 72.842,61.738 74.129,60.451 R139.1 75.566,55.276 76.741,56.451 CON_RS485.1
  Top Layer w2: CON_RS485.1 CON_RS485.2
NetCON_RS485_3: CON_RS485.3 CON_RS485.4 R135.2 R139.2 U130.6 | length 23.1
  Top Layer w0.381: R135.2 70.977,59.676 69.662,58.361 U130.6 69.662,55.56 71.546,53.676 R139.2 74.174,53.721 75.471,53.721 76.741,52.451 CON_RS485.3
  Top Layer w2: CON_RS485.3 CON_RS485.4
NetCON_Slave_1_1: CON_Slave_1.1 CON_Slave_1.2 OC10.3 R12.2 R14.2 | length 27.4
  Top Layer w0.381: CON_Slave_1.1 15.963,58.484 ; v1(15.926,59.411) 15.963,59.373 15.963,58.484 ; R12.2 R14.2 17.192,57.255 15.963,58.484 ; OC10.3@18.285,67.252 v1(18.303,67.27)
  Top Layer w2: CON_Slave_1.2 CON_Slave_1.1
  5V w0.381: v1(15.926,59.411) 15.926,66.685 16.511,67.27 v1(18.303,67.27)
NetCON_Slave_2_1: CON_Slave_2.1 CON_Slave_2.2 OC20.3 R22.2 R24.2 | length 26.9
  Top Layer w0.381: CON_Slave_2.1@13.935,41.529 15.697,41.529 ; v1(15.723,42.494) 15.697,42.469 15.697,41.529 ; R22.2 R24.2 16.962,40.642 16.962,41.178 16.612,41.529 15.697,41.529
  Top Layer w2: CON_Slave_2.2@4.04,41.529 CON_Slave_2.1@13.29,41.529
  5V w0.381: v1(15.723,42.494) 15.723,50.673 16.84,51.791 v1(18.263,51.791)
NetD31_2: D31.2 Q1.3 Relay1.COIL2 | length 53.4
  Top Layer w0.381: Q1.3@42.058,54.605 Q1.3
  Top Layer w0.7: Relay1.COIL2 15.567,29.159 22.809,29.159 43.058,49.408 D31.2 43.058,53.605 Q1.3@42.058,54.605
NetD32_2: D32.2 Q2.3 Relay2.3 | length 18.8
  Top Layer w0.381: D32.2 46.736,51.961 46.736,53.721 48.007,54.992 Q2.3
  Top Layer w0.7: Relay2.3 45.593,45.285 46.718,46.41 D32.2
NetD41_2: D41.2 Micro-USB.1 | length 11.4
  Top Layer w0.381: Micro-USB.1 35.133,81.682 35.082,81.631 35.433,81.28 39.436,81.28 41.262,79.454 41.512,79.454 41.696,79.27 D41.2
NetLED_3: LED.3 uC.8 | length 4.6
  Top Layer w0.381: LED.3 48.81,79.702 uC.8
NetMicro-USB_2: Micro-USB.2 U90.6 | length 14.9
  Top Layer w0.381: U90.6 30.296,73.095 32.893,75.692 32.893,79.756 34.483,81.346 Micro-USB.2
NetMicro-USB_3: Micro-USB.3 U90.5 | length 13.4
  Top Layer w0.3: 33.833,82.474 Micro-USB.3
  Top Layer w0.381: U90.5 30.296,74.365 32.131,76.2 32.131,80.772 33.833,82.474
NetmicroSD_1: microSD.1 microSD.8 R140.2 | length 15.8
  Top Layer w0.381: R140.2@86.8,61.6 86.557,61.843 86.557,62.353 86.334,62.576 85.747,62.576 85.3,63.023 85.3,64 85.78,64.48 microSD.8 88.585,64.64 89.146,64.64 89.369,64.863 89.369,71.808 89.077,72.1 88.505,72.1 microSD.1
NetmicroSD_2: microSD.2 uC.29 | length 21.7
  Top Layer w0.381: uC.29@69.345,77.33 70.57,77.33 v1@70.6,77.3 ; v1@87.224,71.069 v1(87.229,71.075) 87.234,71.08 microSD.2
  5V w0.381: v1(70.622,77.37) 70.624,77.368 72.746,77.368 79.039,71.075 v1(87.229,71.075)
NetmicroSD_3: microSD.3 R143.2 uC.37 | length 29.6
  Top Layer w0.381: uC.37@69.345,87.49 70.91,87.49 72.364,86.036 72.364,80.536 72.9,80 74.3,80 R143.2 74.5,79.8 76.6,79.8 86.42,69.98 microSD.3
NetmicroSD_5: microSD.5 R142.2 uC.30 | length 25.3
  Top Layer w0.38: uC.30@69.345,78.6 69.356,78.589 70.911,78.589 72.7,76.8 72.7,73.858 73.66,72.898 74.333,72.898 R142.2 78.191,72.809 83.22,67.78 microSD.5
NetmicroSD_7: microSD.7 R141.2 uC.31 | length 27.6
  Top Layer w0.381: uC.31@69.345,79.87 69.415,79.8 71.1,79.8 73.4,77.501 73.4,75.058 73.832,74.625 74.409,74.625 R141.2 R141.2@74.225,74.835 ; v1(87.226,65.58) microSD.7
  5V w0.381: v1(74.398,74.636) 74.398,73.15 81.991,65.557 87.204,65.557 v1(87.226,65.58)
NetOC10_1: OC10.1 R10.1 | length 1.7
  Top Layer w0.381: OC10.1 R10.1@26.415,64.73
NetOC11_1: OC11.1 R12.1 | length 6.6
  5V w0.381: v1(18.303,61.27) 18.303,55.362 v1(18.792,54.873)
NetOC11_4: OC11.4 R11.1 uC.26 | length 54.6
  Top Layer w0.381: OC11.4 24.722,61.261 26.788,61.261 R11.1 30.061,61.252 30.48,60.833 61.341,60.833 70.739,70.231 70.739,73.152 70.443,73.448 69.417,73.448 uC.26@69.345,73.52
NetOC20_1: OC20.1 R20.1 | length 2.2
  Top Layer w0.381: OC20.1 24.717,49.234 26.92,49.234 R20.1
NetOC21_1: OC21.1 R22.1 | length 6.6
  5V w0.381: v1(18.288,45.263) 18.288,39.416 v1(18.792,38.912)
NetOC21_4: OC21.4 R21.1 uC.10 | length 62.3
  Top Layer w0.381: OC21.4 24.729,45.285 26.909,45.285 R21.1 28.283,45.301 29.337,46.355 29.337,56.134 31.877,58.674 v1(54.61,58.674) ; uC.10@51.845,77.33 51.852,77.336 53.714,77.336 v1(53.721,77.343)
  5V w0.381: v1(53.721,77.343) 53.763,77.301 54.15,77.301 54.61,76.841 v1(54.61,58.674)
NetOC22_1: OC22.1 R186.2 | length 4.9
  Top Layer w0.7: OC22.1 R186.2@62.687,23.686
NetOC22_3: OC22.3 R187.1 R188.1 | length 25.9
  Top Layer w0.381: v1(65.548,37.5) 65.548,38.942 65.567,38.961 65.567,40.555 R188.1
  5V w0.381: v1(65.548,37.5) 65.548,36.977 70.3,32.225 70.3,18.15 69.775,17.625 69.537,17.625 69.48,17.568 69.079,17.568 v1(69.037,17.526)
NetPin_3: Pin.3 uC.33 | length 60.7
  Top Layer w0.381: uC.33@69.345,82.41 71.107,82.41 v1(71.12,82.423)
  5V w0.381: Pin.3 17.296,86.646 17.296,87.646 18.325,88.675 66.625,88.675 71.12,84.18 v1(71.12,82.423)
NetPin_4: Pin.4 uC.36 | length 60.5
  Top Layer w0.381: uC.36@69.345,86.22 69.355,86.21 70.69,86.21 v1(70.7,86.2)
  5V w0.381: Pin.4 14.752,86.642 14.752,87.65 16.502,89.4 67.525,89.4 70.7,86.225 v1(70.7,86.2)
NetQ1_1: Q1.1 uC.11 | length 25.1
  Top Layer w0.381: Q1.1 43.031,57.023 v1(44.45,57.023) ; v1(49.65,76.15) 49.692,76.108 51.797,76.108 uC.11@51.845,76.06
  5V w0.381: v1(44.45,57.023) 44.45,71.247 46.881,73.678 49.311,76.108 49.608,76.108 v1(49.65,76.15)
NetQ2_1: Q2.1 uC.12 | length 22.3
  Top Layer w0.381: v1(49.682,74.803) 49.689,74.796 51.838,74.796 uC.12@51.845,74.79 ; Q2.1 Q2.1 v1(51.943,57.023)
  5V w0.381: v1(49.682,74.803) 49.657,74.778 49.657,60.452 51.979,58.13 51.979,57.059 v1(51.943,57.023)
NetQ90_1: Q90.1 R90.2 | length 9.4
  Top Layer w0.381: v1(38.354,72.644) R90.2@38.373,72.625 ; v1(38.354,80.137) 38.354,79.896 38.646,79.604 Q90.1
  5V w0.381: v1(38.354,72.644) v1(38.354,80.137)
NetQ90_2: Q90.2 R91.1 U90.14 | length 6
  Top Layer w0.381: U90.14 34.878,76.835 36.195,76.835 ; Q90.2 36.746,77.386 36.195,76.835 ; R91.1 36.792,76.238 36.195,76.835
NetQ91_1: Q91.1 R91.2 | length 7
  Top Layer w0.381: R91.2 38.519,74.168 39.37,74.168 40.132,73.406 40.132,70.104 39.37,69.342 Q91.1@38.836,69.342
NetQ91_2: Q91.2 R90.1 U90.13 | length 7.7
  Top Layer w0.381: U90.13 35.108,75.635 35.9,74.843 35.9,73.625 36.775,72.75 R90.1 ; Q91.2 36.769,69.122 36.769,71.097 36.792,71.12 R90.1@36.792,72.826
NetR10_2: R10.2 uC.24 | length 44.4
  Top Layer w0.381: R10.2 61.176,63.081 66.294,68.199 66.294,70.984 uC.24@66.31,71
NetR20_2: R20.2 uC.23 | length 51.8
  Top Layer w0.381: R20.2 26.924,53.467 26.924,56.261 30.734,60.071 57.721,60.071 v1(57.75,60.1) ; v1(65.024,68.58) 65.032,68.588 65.032,70.992 uC.23@65.04,71
  5V w0.381: v1(57.75,60.1) 65.024,67.374 v1(65.024,68.58)
NetR110_1: R110.1 Transceiver.8 uC.16 | length 46.5
  Top Layer w0.381: R110.1@19.558,73.129 19.708,73.279 19.708,74.507 Transceiver.8 ; R110.1 19.708,71.605 22.86,68.453 25.908,68.453 30.48,63.881 41.783,63.881 47.117,69.215 55.911,69.215 56.134,69.438 56.134,70.984 uC.16@56.15,71
NetR112_1: R112.1 Transceiver.4 | length 8.7
  Top Layer w0.381: R112.1@24.746,72.074 23.557,72.074 23.241,72.39 23.241,76.839 24.807,78.405 Transceiver.4
NetR112_2: R112.2 R113.2 uC.14 | length 35.7
  Top Layer w0.381: R113.2 R112.2@25.965,72.024 ; R112.2 26.064,72.173 26.76,72.173 27.178,71.755 27.178,68.834 31.369,64.643 40.259,64.643 47.698,72.082 uC.14
NetR132_1: R132.1 R138.2 uC.27 | length 26.7
  Top Layer w0.381: R132.1 R138.2 62.329,60.297 71.374,69.342 71.374,74.041 70.625,74.79 uC.27@69.345,74.79
NetR132_2: R132.2 U130.1 | length 3.9
  Top Layer w0.381: R132.2 63.929,53.426 65.591,51.764 U130.1
NetR136_2: R136.2 U130.4 uC.28 | length 36.2
  Top Layer w0.381: uC.28@69.345,76.06 70.752,76.06 72.034,74.778 72.034,68.478 65.278,61.722 65.278,56.388 67.025,54.641 69.311,54.641 70.932,53.02 U130.4 70.98,51.717 70.98,48.323 R136.2
NetR137_2: R137.2 U130.2 U130.3 | length 5.1
  Top Layer w0.381: R137.2 69.027,49.21 68.326,49.911 68.326,51.698 U130.2 U130.3
NetTransceiver_1: Transceiver.1 uC.13 | length 35.9
  Top Layer w0.381: Transceiver.1 26.878,74.595 28.067,73.406 28.067,69.596 32.258,65.405 39.179,65.405 47.126,73.352 uC.13
NetU90_2: U90.2 uC.34 | length 42.9
  Top Layer w0.381: U90.2 30.354,78.175 30.919,78.74 v1(30.988,78.74) ; v1(64.389,83.693) 64.396,83.686 66.103,83.686 66.122,83.668 67.444,83.668 67.463,83.686 69.338,83.686 uC.34@69.345,83.68
  5V w0.381: v1(30.988,78.74) 36.449,84.201 63.721,84.201 64.229,83.693 v1(64.389,83.693)
NetU90_3: U90.3 uC.35 | length 48.6
  Top Layer w0.381: U90.3 29.237,76.933 30.959,76.933 v1(30.988,76.962) ; v1(66.548,84.696) 66.675,84.823 69.218,84.823 uC.35@69.345,84.95
  5V w0.381: v1(30.988,76.962) 35.192,81.166 51.93,81.166 55.626,77.47 62.865,77.47 66.548,81.153 v1(66.548,84.696)
S_GND_1: CON_Slave_1.3 CON_Slave_1.4 OC11.2 R14.1 | length 19.2
  Top Layer w0.381: CON_Slave_1.3@12.806,62.103 14.93,62.103 17.755,59.278 17.755,58.84 17.864,58.73 18.683,58.73 18.792,58.621 R14.1
  Top Layer w2: CON_Slave_1.4 CON_Slave_1.3
S_GND_2: CON_Slave_2.3 CON_Slave_2.4 OC21.2 R24.1 | length 18.3
  Top Layer w0.381: CON_Slave_2.3@13.277,45.339 15.494,45.339 16.383,44.45 16.383,43.561 17.21,42.734 18.299,42.734 OC21.2 18.56,42.73 18.669,42.62 R24.1@18.669,40.577
  Top Layer w2: CON_Slave_2.4 CON_Slave_2.3
S_Vcc_1: CON_Slave_1.5 CON_Slave_1.6 OC10.4 | length 15.2
  Top Layer w0.381: CON_Slave_1.5@12.903,66.167 16.866,66.167 OC10.4
  Top Layer w2: CON_Slave_1.6 CON_Slave_1.5
S_Vcc_2: CON_Slave_2.5 CON_Slave_2.6 OC20.4 | length 14.9
  Top Layer w0.381: CON_Slave_2.5@12.702,49.23 OC20.4
  Top Layer w2: CON_Slave_2.6 CON_Slave_2.5
pads on no net: LED.1 Micro-USB.4 Pin.5 Relay1.NC Transceiver.5 U2.4 U90.7 U90.8 U90.9 U90.10 U90.11 U90.12 U90.15 uC.4 uC.5 uC.9 uC.17 uC.18 uC.19 uC.20 uC.21 uC.22 uC.32

## Polygon pours and split planes (outlines as drawn)
3V3 on 3V3 "3V3_L02_P000" (solid, pour order 0): 90.217,-0.09 68.543,-0.09 68.543,35.306 67.146,36.703 23.712,36.703 23.712,67.818 21.045,70.485 0,70.485 0,90.127 90.217,90.127
M_GND on M_GND "M_GND_L03_P001" (solid, pour order 1): 68.58,0 90.043,0 90.043,90.17 89.916,90.043 0,90.043 0,70.485 20.955,70.485 23.749,67.691 23.749,36.703 67.056,36.703 68.707,35.052 68.58,34.925 68.58,0 71.882,0 71.12,0
5V on 5V "5V_L04_P002" (solid, pour order 2): 90.043,0 90.043,90.551 90.17,90.678 89.916,90.932 0,90.932 0,70.485 21.082,70.485 23.749,67.818 23.749,36.703 67.056,36.703 68.58,35.179 68.707,35.179 68.707,0
M_GND on Top Layer "M_GND_L01_P004" (solid, remove dead copper, pour order 4): 68.555,0 68.529,0.025 68.555,16.225 70.875,17.526 70.875,35.433 68.428,35.433 67.158,36.703 23.724,36.703 23.724,67.742 20.98,70.485 0,70.485 0,90.018 90.373,90.018 90.449,90.094 90.653,89.891 90.653,0

## Silkscreen, mask and mechanical layers (free items; w line width, h text height)
Top Overlay:
  text "RTC" at 11.095,83.38 h2
  text "CANL / CANH" at 3.2,69.012 h1.5
  text "S_Vcc / S_GND / SlaveCom" at 3.129,51.975 h1.4
  text "B / A" at 87.375,47.075 h2
  text "S_Vcc / S_GND / SlaveCom" at 3.629,35.075 h1.4
  text "IgnDet / M_GND / ExtVcc" at 80.289,14.986 h2 r270
  text "N / L / L'" at 53.34,6.756 h2 r270
  text "BMS-Master / Kaiser/Tucek / 2023/24" at 22.987,4.623 h2.5
Bottom Overlay:
  drawing of 29 lines, arcs and shapes, not listed
  text "BMS-Master / Kaiser/Tucek / 2023/24" at 88.316,8.85 h5
Bottom Solder:
  lines w2.5: 37.208,25.5 37.208,18.316 39.928,15.596 39.928,7.5 ; 44.983,7.544 44.983,15.469 55.008,25.493 55.008,28
Kontur:
  lines w0.254: 0,4 0,85.5 ; 0,4.5 ccw(c4.5,4.5) 4.5,0 ; 4,0 85.5,0 ccw(c85.5,4.5) 90,4.5 90,85.5 ccw(c85.5,85.5) 85.5,90 4.5,90 ccw(c4.5,85.5) 0,85.5 ; 0,85.5 0,85.5 ; 0,85.5 0,85.5
Mechanical 15:
  lines w0.254: 63.15,34.975 63.375,34.975

## Text inside footprints (layer, text, board x,y; h text height)
uC: Kontur "ANTENNA" at 54.495,92.332 h1.78